# Allegro board test.brd
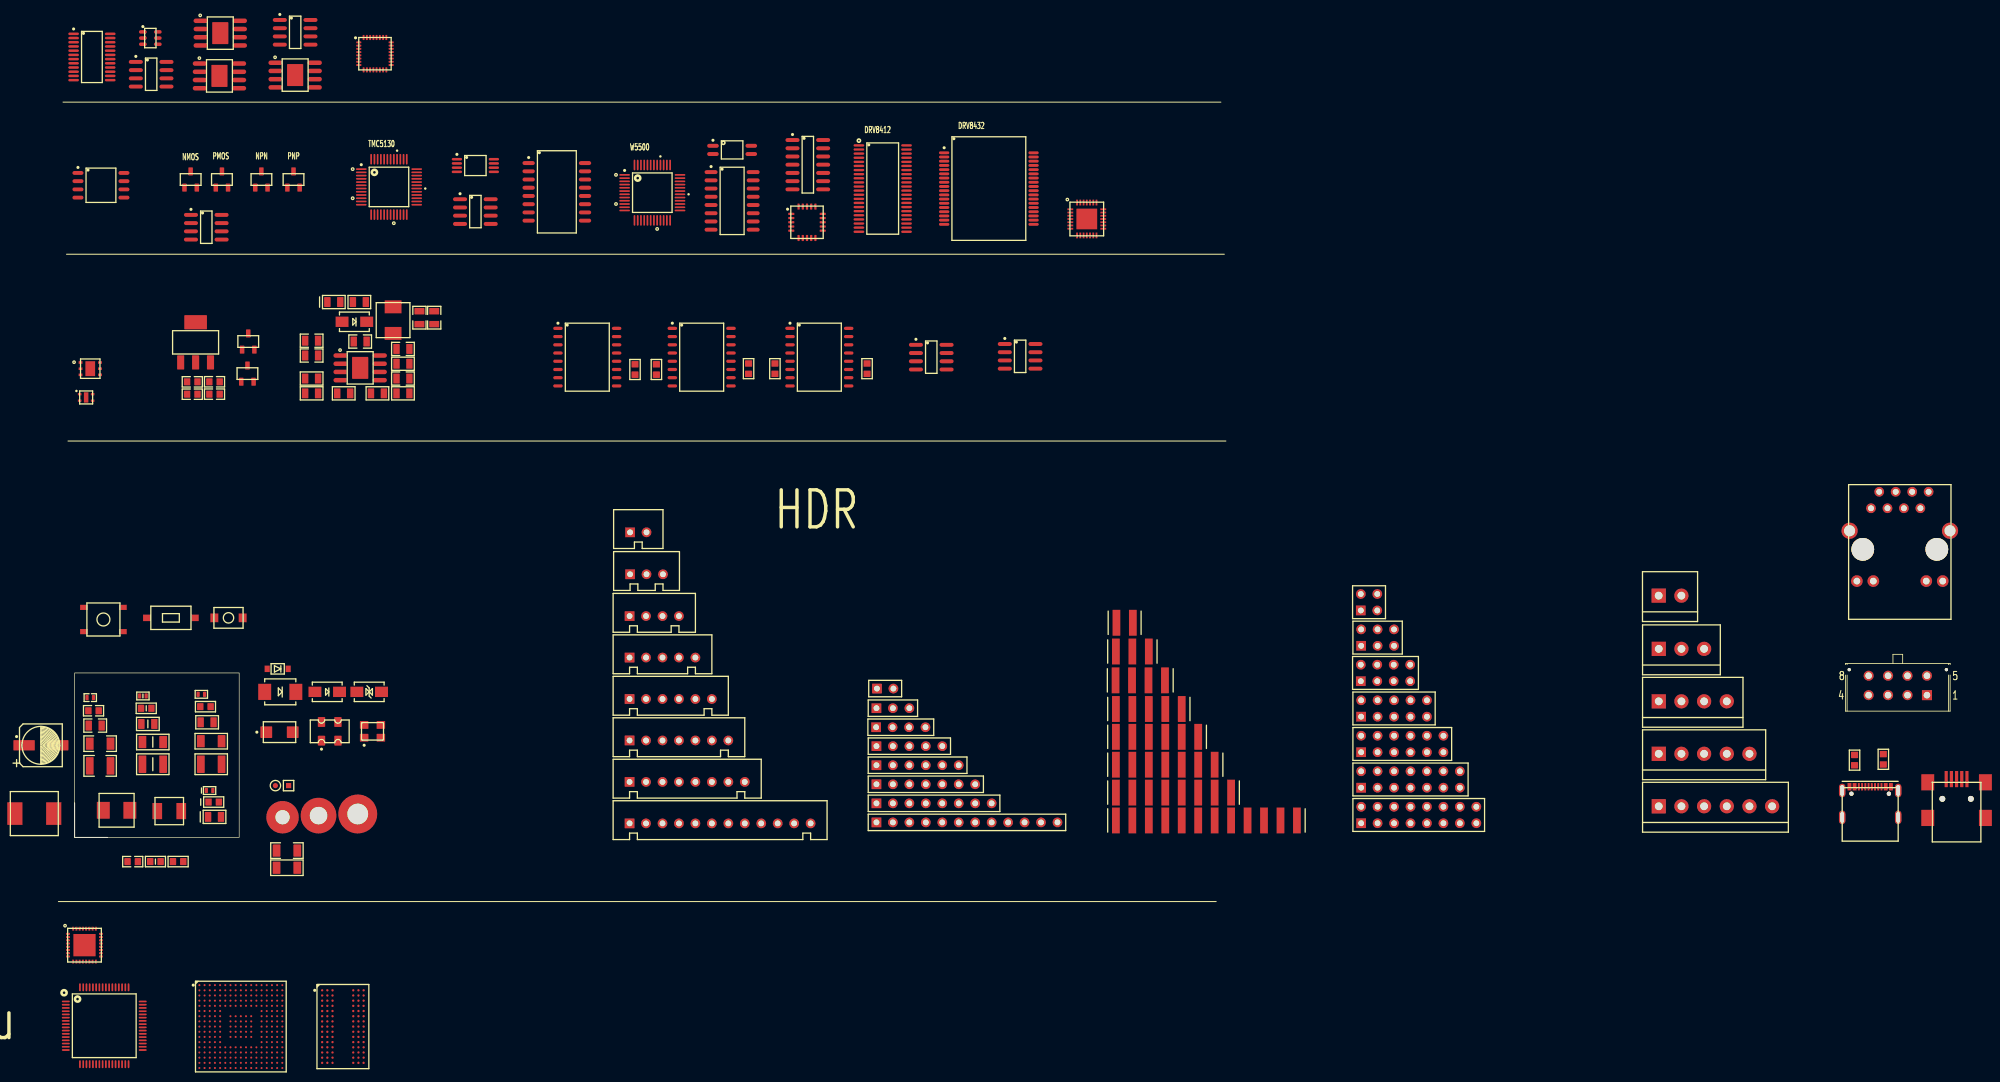
[diagram p0: board, top side]
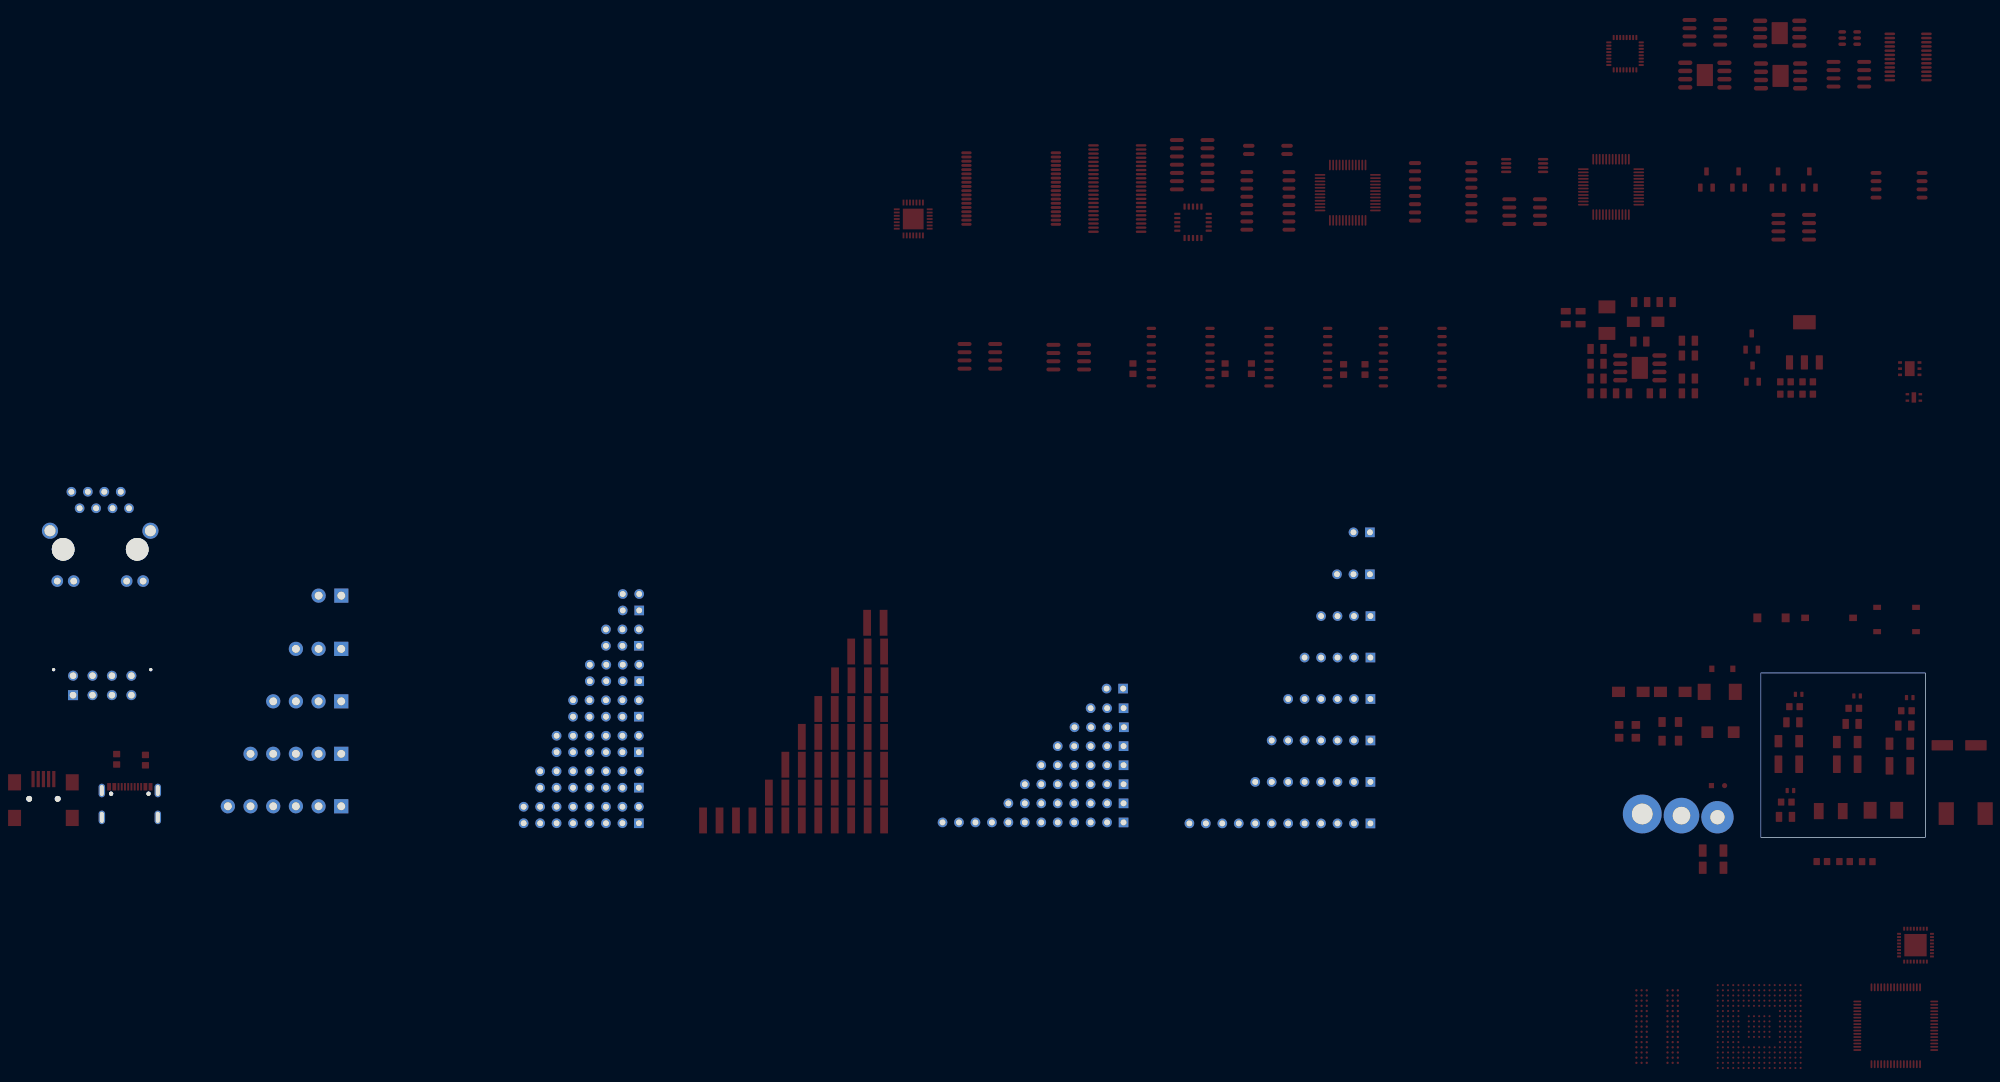
[diagram p1: board, bottom side, seen from below]

Outline 25.4 x 25.4 mm; copper layers: TOP, BOTTOM. Coordinates in mm from the lower left corner of the outline.
Outline path: rectangle 0,0 25.4,25.4

## Placement (name value [footprint] x y rotation side)
C1  100nF  [C0402]  2.41 21.59 0 top
C2  100nF  [C0603]  2.92 19.56 0 top
C3  100nF  [C0805]  3.17 17.27 0 top
C4  100nF  [C1206]  3.94 14.48 0 top
C5  100nF  [C1210]  3.94 11.05 0 top
C6  100nF  [C0805]  44.07 76.58 0 top
C7  100nF  [C0805]  36.58 76.71 0 top
C8  2.2uF  [C0805]  36.58 74.42 0 top
C9  100nF  [C0805]  55.5 80.26 90 top
C10  10uF  [C0805]  53.21 80.26 90 top
C11  4.7nF  [C0805]  50.67 75.44 0 top
C12  4.7pF  [C0805]  50.67 70.87 180 top
C13  100nF  [C0603]  21.59 68.45 0 top
C14  10uF  [C0603]  21.59 70.36 0 top
C15  100nF  [C0603]  18.16 68.45 180 top
C16  10uF  [C0603]  18.16 70.36 180 top
C17  47uF  [CAPAE660X550]  -5.21 14.22 0 top
C18  100nF  [C0603]  8.97 -3.74 0 top
C19  1nF 2KV  [C1206]  32.77 -2.03 0 top
D1  SS34  [SMA]  41.27 79.63 0 top
D2  SS34  [SMA]  37.08 22.48 0 top
D3  SS54  [SMB]  29.34 22.48 0 top
D4  SMAJ24CA  [SMA_CA]  43.56 22.48 0 top
D5  SS1060  [SOD123]  29.72 26.04 0 top
H1  -  [HR911105A]  281.69 46.48 0 top
J1  -  [TYPE-C-16P]  277.11 5.46 0 top
J2  USB-MINI  [U-M-M5SS-W-2]  290.45 8.51 90 top
J3  CON2  [XH2-254]  85.72 47.12 0 top
J4  CON3  [XH3-254]  85.72 40.64 0 top
J5  CON4  [XH4-254]  85.65 34.18 0 top
J6  CON5  [XH5-254]  85.65 27.78 0 top
J7  CON6  [XH6-254]  85.65 21.38 0 top
J8  CON7  [XH7-254]  85.65 14.97 0 top
J9  CON8  [XH8-254]  85.65 8.57 0 top
J10  CON12  [XH12-254]  85.65 2.17 0 top
J11  CON2  [KF2EDGV-35-2P]  244.47 37.34 0 top
J12  CON3  [KF2EDGV-35-3P]  244.48 29.12 0 top
J13  CON4  [KF2EDGV-35-4P]  244.48 21.02 0 top
J14  CON5  [KF2EDGV-35-5P]  244.48 12.91 0 top
J15  CON6  [KF2EDGV-35-6P]  244.48 4.81 0 top
J16  MOLEX-430450812  [SYM-43045-0812]  285.88 21.97 0 top
J17  CON2  [TH2-254]  123.83 22.99 0 top
J18  CON3  [TH3-254]  123.75 19.96 0 top
J19  CON4  [TH4-254]  123.7 17.02 0 top
J20  CON5  [TH5-254]  123.75 14.09 0 top
J21  CON6  [TH6-254]  123.75 11.15 0 top
J22  CON7  [TH7-254]  123.75 8.21 0 top
J23  CON8  [TH8-254]  123.75 5.26 0 top
J24  CON12  [TH12-254]  123.75 2.32 0 top
J25  CON2X2  [TH2X2-254]  198.5 35.05 0 top
J26  CON3X2  [TH3X2-254]  198.55 29.59 0 top
J27  CON4X2  [TH4X2-254]  198.5 24.13 0 top
J28  CON5X2  [TH5X2-254]  198.55 18.64 0 top
J29  CON6X2  [TH6X2-254]  198.55 13.16 0 top
J30  CON7X2  [TH7X2-254]  198.55 7.68 0 top
J31  CON8X2  [TH8X2-254]  198.55 2.19 0 top
J32  CON2  [TH2T-254]  160.78 33.15 0 top
J33  CON3  [TH3T-254]  160.7 28.71 0 top
J34  CON4  [TH4T-254]  160.66 24.26 0 top
J35  CON5  [TH5T-254]  160.7 19.83 0 top
J36  CON6  [TH6T-254]  160.7 15.53 0 top
J37  CON7  [TH7T-254]  160.7 11.23 0 top
J38  CON8  [TH8T-254]  160.7 6.92 0 top
J39  CON12  [TH12T-254]  160.7 2.62 0 top
K1  -  [TS-1187A]  4.45 33.66 0 top
K2  TS-1101-C-W  [K36_60]  14.86 33.91 0 top
K3  -  [SKRKAEE020]  23.75 33.91 0 top
L1  4.7uH  [L0402]  10.54 21.84 0 top
L2  4.7uH  [L0603]  11.05 19.94 0 top
L3  4.7uH  [L0805]  11.3 17.53 0 top
L4  4.7uH  [L1206]  12.06 14.73 0 top
L5  4.7uH  [L1210]  12.06 11.3 0 top
L6  4.7uH  [L4020]  14.61 4.06 0 top
L7  4.7uH  [L5030]  6.48 4.19 0 top
L8  4.7uH  [L5030]  49.15 79.88 90 top
L9  4.7uH  [L6030]  -6.22 3.68 0 top
L10  4.7uH  [L0603]  12.47 -3.73 0 top
LED1  LED-B  [LED0402-RD]  20.83 7.24 0 top
LED2  LED-B  [LED0603-RD]  21.46 5.46 0 top
LED3  LED-B  [LED0805-RD]  21.59 3.17 0 top
LED4  LED-R  [LED0805-RD]  40.01 82.68 0 top
M1  2N7002  [SOT-23-3L-BR]  17.91 101.6 270 top
M2  AO3401A  [SOT-23-3L-BR]  22.73 101.6 270 top
Q1  SS8050  [SOT-23-3L-BR]  28.83 101.6 270 top
Q2  SS8550  [SOT-23-3L-BR]  33.78 101.6 270 top
R1  10K  [R0402]  19.56 22.1 0 top
R2  10K  [R0603]  20.19 20.19 0 top
R3  10K  [R0805]  20.45 17.78 0 top
R4  10K  [R1206]  21.08 14.86 0 top
R5  10K  [R1210]  21.08 11.3 0 top
R6  5.1k  [R0603]  274.7 11.94 270 top
R7  5.1k  [R0603]  279.15 12.06 270 top
R8  100K  [R0805]  36.58 70.87 180 top
R9  33K  [R0805]  36.58 68.58 0 top
R10  100K  [R0805]  41.53 68.58 180 top
R11  12K  [R0805]  50.67 73.15 180 top
R12  51K  [R0805]  50.67 68.58 0 top
R13  10K  [R0805]  46.74 68.58 0 top
R14  10K  [R0805]  43.94 82.68 0 top
R15  10K  [R0603]  86.49 72.26 90 top
R16  10K  [R0603]  104.01 72.39 90 top
R17  10K  [R0603]  122.3 72.39 90 top
R18  10K  [R0603]  89.79 72.26 90 top
R19  10K  [R0603]  108.08 72.39 90 top
R20  10K  [R0603]  15.97 -3.73 0 top
R21  10M  [R1206]  32.76 -4.68 0 top
T1  -  [TP80]  30.99 8 0 top
T2  -  [TPS80]  33.02 8 0 top
T3  M2.0  [MTG220_500]  32.09 3.12 0 top
T4  M2.5  [MTG270_550]  37.64 3.37 0 top
T5  M3.0  [MTG320_600]  43.7 3.62 0 top
U1  STM32L432KCU6  [QFN-32-50]  1.52 -16.64 0 top
U2  SHT20  [DFN-6]  2.41 72.39 90 top
U3  SHTC3  [DFN-4]  1.78 67.94 0 top
U4  TPS54340  [SOIC-8-BL-EP]  44.07 72.52 270 top
U5  ADUM1400  [SOIC127P1032X265-16]  79.12 74.17 270 top
U6  ADUM1401  [SOIC127P1032X265-16]  96.77 74.17 270 top
U8  ADUM1402  [SOIC127P1032X265-16]  114.94 74.17 270 top
U9  ADUM3200  [SOIC127P600X175-8]  132.21 74.17 270 top
U10  ADUM3201  [SOIC127P600X175-8]  145.92 74.3 270 top
U11  W25Q128  [SOIC127P790X195-8]  4.06 100.71 270 top
U12  STM32F405RGT6  [TSQFP50P1290X1290X120-64]  4.57 -29.08 0 top
U13  STM32H743XIH6  [TFBGA240_25]  25.65 -29.21 0 top
U14  IS42S32800G  [BGA90C80P9X15_800X1300X120]  41.4 -29.21 0 top
U15  AMS1117-3.3  [SOT-223-3-BR]  18.67 76.45 270 top
U16  IRF9310TRPBF  [SOIC127P600X175-8]  20.32 94.23 270 top
U17  ME6211A33M3G-N  [SOT-23-3L-BR]  26.8 76.58 270 top
U18  TMC5130-TA  [TSQFP50P900X900X160-48]  48.51 100.46 0 top
U19  SN74CBT3306PWR  [TSOP65P640X110-8]  61.85 103.76 270 top
U20  SLVU2.8-4  [SOIC127P600X175-8]  61.85 96.65 270 top
U21  13F-39MNL  [SOP127P970X508-16]  74.42 99.69 270 top
U22  W5500  [TSQFP50P900X900X160-48]  89.15 99.57 0 top
U23  PS2801-1  [SOP127P680-4]  101.47 106.17 270 top
U24  PS2801C-4  [SOIC127P760X203-16]  101.47 98.3 270 top
U25  CD4078B  [SOIC127P600X175-14]  113.16 103.89 270 top
U26  MAX31865  [QFN65P500X500X100-21A]  113.03 95 0 top
U27  DRV8412  [HTSSOP-44]  124.71 100.2 270 top
U28  DRV8432  [SOP65P1400X127-36]  141.1 100.2 270 top
U29  AD5420  [TSOP65P640X120-24]  2.67 120.52 270 top
U30  MP2359DJ-LF-Z  [SOT95P280X100-6]  11.68 123.44 270 top
U32  LM393  [SOIC127P600X175-8]  11.81 117.86 270 top
U33  A6211  [SOIC-8-BL-EP]  22.48 124.21 270 top
U34  DRV8870  [SOIC-8-BL-EP]  22.35 117.6 270 top
U35  OPA2333  [SOIC127P600X175-8]  34.04 124.33 270 top
U36  TMC429-LI  [QFN50P500X500X80-33B]  46.35 121.03 0 top
U37  TP4056  [SOIC-8-BL-EP]  34.04 117.73 270 top
U38  XC6206P332MR  [SOT-23-3L-BR]  26.67 71.63 270 top
U39  CP2102-GMR  [QFN-28-50]  156.21 95.5 0 top
Y1  8MHz  [OSCSF500X320X130-2]  31.62 16.26 0 top
Y2  16MHz  [OSCSC254P350X600X140-4]  39.37 16.38 90 top
Y3  25MHz  [OSCCC250X320X110]  45.97 16.38 90 top

## Library data of the parts
C1 = C0402: User Part Number: pn; Tolerance: RichardLC
C2 C13-C16 = C0603: User Part Number: pn; Tolerance: RichardLC
C3 C6-C12 = C0805: User Part Number: pn; Tolerance: RichardLC
C4 C19 = C1206: User Part Number: pn; Tolerance: RichardLC
C5 = C1210: User Part Number: pn; Tolerance: RichardLC
C17 = CAP+: User Part Number: pn; Tolerance: RichardLC
C18 = C: User Part Number: pn; Tolerance: RichardLC
D1-D3 D5 = DIODE
D4 = DIODE_CA
H1 = HR911105A: User Part Number: pn; Tolerance: RichardLC
J1 = TYPE-C-16P: User Part Number: pn; Tolerance: RichardLC
J2 = USB-MINI: User Part Number: pn; Tolerance: RichardLC
J3 J11 J17 J32 = CON2: User Part Number: pn; Tolerance: RichardLC
J4 J12 J18 J33 = CON3: User Part Number: pn; Tolerance: RichardLC
J5 J13 J19 J34 = CON4: User Part Number: pn; Tolerance: RichardLC
J6 J14 J20 J35 = CON5: User Part Number: pn; Tolerance: RichardLC
J7 J15 J21 J36 = CON6: User Part Number: pn; Tolerance: RichardLC
J8 J22 J37 = CON7: User Part Number: pn; Tolerance: RichardLC
J9 J23 J38 = CON8: User Part Number: pn; Tolerance: RichardLC
J10 J24 J39 = CON12: User Part Number: pn; Tolerance: RichardLC
J16 = MOLEX-430450812
J25 = CON2X2: User Part Number: pn; Tolerance: RichardLC
J26 = CON3X2: User Part Number: pn; Tolerance: RichardLC
J27 = CON4X2: User Part Number: pn; Tolerance: RichardLC
J28 = CON5X2: User Part Number: pn; Tolerance: RichardLC
J29 = CON6X2: User Part Number: pn; Tolerance: RichardLC
J30 = CON7X2: User Part Number: pn; Tolerance: RichardLC
J31 = CON8X2: User Part Number: pn; Tolerance: RichardLC
K1 = BUTTON-4: User Part Number: pn; Tolerance: RichardLC
K2 K3 = BUTTON: User Part Number: pn; Tolerance: RichardLC
L1 = L0402: User Part Number: pn; Tolerance: RichardLC
L2 = L0603: User Part Number: pn; Tolerance: RichardLC
L3 = L0805: User Part Number: pn; Tolerance: RichardLC
L4 = L1206: User Part Number: pn; Tolerance: RichardLC
L5 = L1210: User Part Number: pn; Tolerance: RichardLC
L6 = L4020: User Part Number: pn; Tolerance: RichardLC
L7 L8 = L5030: User Part Number: pn; Tolerance: RichardLC
L9 = L6030: User Part Number: pn; Tolerance: RichardLC
L10 = L: User Part Number: pn; Tolerance: RichardLC
LED1 = LED0402-RD: User Part Number: pn; Tolerance: RichardLC
LED2 = LED0603-RD: User Part Number: pn; Tolerance: RichardLC
LED3 LED4 = LED0805-RD: User Part Number: pn; Tolerance: RichardLC
M1 = MOSFET_N: User Part Number: pn; Tolerance: RichardLC
M2 = MOSFET_P: User Part Number: pn; Tolerance: RichardLC
Q1 = NPN: User Part Number: pn; Tolerance: RichardLC
Q2 = PNP: User Part Number: pn; Tolerance: RichardLC
R1 = R0402: User Part Number: pn; Tolerance: RichardLC
R2 R6 R7 R15-R19 = R0603: User Part Number: pn; Tolerance: RichardLC
R3 R8-R14 = R0805: User Part Number: pn; Tolerance: RichardLC
R4 R21 = R1206: User Part Number: pn; Tolerance: RichardLC
R5 = R1210: User Part Number: pn; Tolerance: RichardLC
R20 = R: User Part Number: pn; Tolerance: RichardLC
T1-T5 = TP: User Part Number: pn; Tolerance: RichardLC
U1 = STM32L432KCU6: User Part Number: pn; Tolerance: RichardLC
U2 = SHT20: User Part Number: pn; Tolerance: RichardLC
U3 = SHTC3: User Part Number: pn; Tolerance: RichardLC
U4 = TPS54340: User Part Number: pn; Tolerance: RichardLC
U5 = ADUM1400: User Part Number: pn; Tolerance: RichardLC
U6 = ADUM1401: User Part Number: pn; Tolerance: RichardLC
U8 = ADUM1402: User Part Number: pn; Tolerance: RichardLC
U9 = ADUM3200: User Part Number: pn; Tolerance: RichardLC
U10 = ADUM3201: User Part Number: pn; Tolerance: RichardLC
U11 = W25Q16: User Part Number: pn; Tolerance: RichardLC
U12 = STM32F405RGT6: User Part Number: pn; Tolerance: RichardLC
U13 = STM32H743XIH6: User Part Number: pn; Tolerance: RichardLC
U14 = IS42S32800G: User Part Number: pn; Tolerance: RichardLC
U15 = AMS1117: User Part Number: pn; Tolerance: RichardLC
U16 = IRF9310TRPBF: User Part Number: pn; Tolerance: RichardLC
U17 U38 = ME6211A33M3G-N: User Part Number: pn; Tolerance: RichardLC
U18 = TMC5130-TA: User Part Number: pn; Tolerance: RichardLC
U19 = SN74CBT3306PWR: User Part Number: pn; Tolerance: RichardLC
U20 = SLVU2.8-4: User Part Number: pn; Tolerance: RichardLC
U21 = 13F-39MNL: User Part Number: pn; Tolerance: RichardLC
U22 = W5500: User Part Number: pn; Tolerance: RichardLC
U23 = PS2801-1: User Part Number: pn; Tolerance: RichardLC
U24 = PS2801C-4: User Part Number: pn; Tolerance: RichardLC
U25 = CD4078B: User Part Number: pn; Tolerance: RichardLC
U26 = MAX31865: User Part Number: pn; Tolerance: RichardLC
U27 = DRV8412: User Part Number: pn; Tolerance: RichardLC
U28 = DRV8432: User Part Number: pn; Tolerance: RichardLC
U29 = AD5420: User Part Number: pn; Tolerance: RichardLC
U30 = MP2359DJ-LF-Z: User Part Number: pn; Tolerance: RichardLC
U32 = LM393: User Part Number: pn; Tolerance: RichardLC
U33 = A6211: User Part Number: pn; Tolerance: RichardLC
U34 = DRV8870: User Part Number: pn; Tolerance: RichardLC
U35 = OPA2333: User Part Number: pn; Tolerance: RichardLC
U36 = TMC429-LI: User Part Number: pn; Tolerance: RichardLC
U37 = TP4056: User Part Number: pn; Tolerance: RichardLC
U39 = CP2102-GMR: User Part Number: pn; Tolerance: RichardLC
Y1 = CRYSTAL: User Part Number: pn; Tolerance: RichardLC
Y2 = CRYSTAL_1: User Part Number: pn; Tolerance: RichardLC
Y3 = CRYSTAL_2: User Part Number: pn; Tolerance: RichardLC

## Footprints (pads in the part's own frame, mm; a bottom-side part is the same pattern mirrored in y, then rotated)
BGA90C80P9X15_800X1300X120
  round 0.36 smd: A1(-3.2,5.6) A2(-2.4,5.6) A3(-1.6,5.6) A7(1.6,5.6) A8(2.4,5.6) A9(3.2,5.6) B1(-3.2,4.8) B2(-2.4,4.8) B3(-1.6,4.8) B7(1.6,4.8) B8(2.4,4.8) B9(3.2,4.8) C1(-3.2,4) C2(-2.4,4) C3(-1.6,4) C7(1.6,4) C8(2.4,4) C9(3.2,4) D1(-3.2,3.2) D2(-2.4,3.2) D3(-1.6,3.2) D7(1.6,3.2) D8(2.4,3.2) D9(3.2,3.2) E1(-3.2,2.4) E2(-2.4,2.4) E3(-1.6,2.4) E7(1.6,2.4) E8(2.4,2.4) E9(3.2,2.4) F1(-3.2,1.6) F2(-2.4,1.6) F3(-1.6,1.6) F7(1.6,1.6) F8(2.4,1.6) F9(3.2,1.6) G1(-3.2,0.8) G2(-2.4,0.8) G3(-1.6,0.8) G7(1.6,0.8) G8(2.4,0.8) G9(3.2,0.8) H1(-3.2,0) H2(-2.4,0) H3(-1.6,0) H7(1.6,0) H8(2.4,0) H9(3.2,0) J1(-3.2,-0.8) J2(-2.4,-0.8) J3(-1.6,-0.8) J7(1.6,-0.8) J8(2.4,-0.8) J9(3.2,-0.8) K1(-3.2,-1.6) K2(-2.4,-1.6) K3(-1.6,-1.6) K7(1.6,-1.6) K8(2.4,-1.6) K9(3.2,-1.6) L1(-3.2,-2.4) L2(-2.4,-2.4) L3(-1.6,-2.4) L7(1.6,-2.4) L8(2.4,-2.4) L9(3.2,-2.4) M1(-3.2,-3.2) M2(-2.4,-3.2) M3(-1.6,-3.2) M7(1.6,-3.2) M8(2.4,-3.2) M9(3.2,-3.2) N1(-3.2,-4) N2(-2.4,-4) N3(-1.6,-4) N7(1.6,-4) N8(2.4,-4) N9(3.2,-4) P1(-3.2,-4.8) P2(-2.4,-4.8) P3(-1.6,-4.8) P7(1.6,-4.8) P8(2.4,-4.8) P9(3.2,-4.8) R1(-3.2,-5.6) R2(-2.4,-5.6) R3(-1.6,-5.6) R7(1.6,-5.6) R8(2.4,-5.6) R9(3.2,-5.6)
C0402
  custom 0.5x0.8 smd: 1(-0.5,0) 2(0.5,0)
C0603
  custom 1x1.1 smd: 1(-0.8,0) 2(0.8,0)
C0805
  custom 1x1.55 smd: 1(-1,0) 2(1,0)
C1206
  custom 1.2x1.9 smd: 1(-1.6,0) 2(1.6,0)
C1210
  custom 1.2x2.7 smd: 1(-1.6,0) 2(1.6,0)
CAPAE660X550
  custom 3.31x1.6 smd: 1(-2.595,0) 2(2.595,0)
DFN-4
  custom 0.55x0.35 smd: 1(-1,0.5) 2(-1,-0.5) 3(1,-0.5) 4(1,0.5)
  custom 0.7x1.6 smd: 5(0,0)
DFN-6
  custom 0.4x0.6 smd: 1(0.95,1.5) 2(0,1.5) 3(-0.95,1.5) 4(-0.95,-1.5) 5(0,-1.5) 6(0.95,-1.5)
  custom 2.3x1.5 smd: 7(0,0)
HR911105A
  round 3.5 hole 3.5: (-5.715,-1.995) (5.715,-1.995)
  round 1.499 hole 0.914: 1(-4.445,4.355) 2(-3.175,6.895) 3(-1.905,4.355) 4(-0.635,6.895) 5(0.635,4.355) 6(1.905,6.895) 7(3.175,4.355) 8(4.445,6.895)
  round 1.8 hole 1.04: 9(-6.625,-6.895) 10(-4.085,-6.895) 11(4.085,-6.895) 12(6.625,-6.895)
  round 2.5 hole 1.7: 13(-7.75,0.875) 14(7.75,0.875)
HTSSOP-44
  oval 0.37x1.65 smd: 1(-6.668,-3.675) 2(-6.033,-3.675) 3(-5.398,-3.675) 4(-4.762,-3.675) 5(-4.128,-3.675) 6(-3.493,-3.675) 7(-2.858,-3.675) 8(-2.222,-3.675) 9(-1.588,-3.675) 10(-0.953,-3.675) 11(-0.318,-3.675) 12(0.317,-3.675) 13(0.952,-3.675) 14(1.588,-3.675) 15(2.222,-3.675) 16(2.858,-3.675) 17(3.492,-3.675) 18(4.127,-3.675) 19(4.762,-3.675) 20(5.397,-3.675) 21(6.032,-3.675) 22(6.668,-3.675) 23(6.668,3.675) 24(6.033,3.675) 25(5.398,3.675) 26(4.762,3.675) 27(4.128,3.675) 28(3.493,3.675) 29(2.858,3.675) 30(2.222,3.675) 31(1.588,3.675) 32(0.953,3.675) 33(0.318,3.675) 34(-0.317,3.675) 35(-0.952,3.675) 36(-1.588,3.675) 37(-2.222,3.675) 38(-2.858,3.675) 39(-3.492,3.675) 40(-4.127,3.675) 41(-4.762,3.675) 42(-5.397,3.675) 43(-6.032,3.675) 44(-6.668,3.675)
K36_60
  custom 1.2x1 smd: 1(-3.7,0) 2(3.7,0)
KF2EDGV-35-2P
  rect 2.2x2.2 hole 1.2: 1(0,0)
  round 2.2 hole 1.2: 2(3.5,0)
KF2EDGV-35-3P
  rect 2.2x2.2 hole 1.2: 1(0,0)
  round 2.2 hole 1.2: 2(3.5,0) 3(7,0)
KF2EDGV-35-4P
  rect 2.2x2.2 hole 1.2: 1(0,0)
  round 2.2 hole 1.2: 2(3.5,0) 3(7,0) 4(10.5,0)
KF2EDGV-35-5P
  rect 2.2x2.2 hole 1.2: 1(0,0)
  round 2.2 hole 1.2: 2(3.5,0) 3(7,0) 4(10.5,0) 5(14,0)
KF2EDGV-35-6P
  rect 2.2x2.2 hole 1.2: 1(0,0)
  round 2.2 hole 1.2: 2(3.5,0) 3(7,0) 4(10.5,0) 5(14,0) 6(17.5,0)
L0402
  custom 0.5x0.8 smd: 1(-0.5,0) 2(0.5,0)
L0603
  custom 1x1.1 smd: 1(-0.8,0) 2(0.8,0)
L0805
  custom 1x1.55 smd: 1(-1,0) 2(1,0)
L1206
  custom 1.2x1.9 smd: 1(-1.6,0) 2(1.6,0)
L1210
  custom 1.2x2.7 smd: 1(-1.6,0) 2(1.6,0)
L4020
  custom 1.5x2.5 smd: 1(-1.85,0) 2(1.85,0)
L5030
  custom 2x2.6 smd: 1(-2.05,0) 2(2.05,0)
L6030
  custom 2.35x3.5 smd: 1(-3,0) 2(3,0)
LED0402-RD
  custom 0.5x0.8 smd: 1(-0.5,0) 2(0.5,0)
LED0603-RD
  custom 1x1.1 smd: 1(-0.8,0) 2(0.8,0)
LED0805-RD
  custom 1x1.55 smd: 1(-1,0) 2(1,0)
MTG220_500
  round 5 hole 2.2: 1(0,0)
MTG270_550
  round 5.5 hole 2.7: 1(0,0)
MTG320_600
  round 6 hole 3.2: 1(0,0)
OSCCC250X320X110
  custom 1.22x1.32 smd: 1(-0.99,1.29) 2(-0.99,-1.29) 3(0.99,-1.29) 4(0.99,1.29)
OSCSC254P350X600X140-4
  custom 1.52x1.14 smd: 1(-1.44,1.27) 2(-1.44,-1.27) 3(1.44,-1.27) 4(1.44,1.27)
OSCSF500X320X130-2
  custom 1.82x1.8 smd: 1(-2.04,0) 2(2.04,0)
QFN50P500X500X80-33B
  custom 0.8x0.3 smd: 1(-2.5,1.75) 2(-2.5,1.25) 3(-2.5,0.75) 4(-2.5,0.25) 5(-2.5,-0.25) 6(-2.5,-0.75) 7(-2.5,-1.25) 8(-2.5,-1.75) 17(2.5,-1.75) 18(2.5,-1.25) 19(2.5,-0.75) 20(2.5,-0.25) 21(2.5,0.25) 22(2.5,0.75) 23(2.5,1.25) 24(2.5,1.75)
  custom 0.3x0.8 smd: 9(-1.75,-2.5) 10(-1.25,-2.5) 11(-0.75,-2.5) 12(-0.25,-2.5) 13(0.25,-2.5) 14(0.75,-2.5) 15(1.25,-2.5) 16(1.75,-2.5) 25(1.75,2.5) 26(1.25,2.5) 27(0.75,2.5) 28(0.25,2.5) 29(-0.25,2.5) 30(-0.75,2.5) 31(-1.25,2.5) 32(-1.75,2.5)
QFN65P500X500X100-21A
  custom 0.95x0.35 smd: 1(-2.425,1.3) 2(-2.425,0.65) 3(-2.425,0) 4(-2.425,-0.65) 5(-2.425,-1.3) 11(2.425,-1.3) 12(2.425,-0.65) 13(2.425,0) 14(2.425,0.65) 15(2.425,1.3)
  custom 0.35x0.95 smd: 6(-1.3,-2.425) 7(-0.65,-2.425) 8(0,-2.425) 9(0.65,-2.425) 10(1.3,-2.425) 16(1.3,2.425) 17(0.65,2.425) 18(0,2.425) 19(-0.65,2.425) 20(-1.3,2.425)
QFN-28-50
  custom 3.2x3.2 smd: (0,0)
  custom 0.9x0.28 smd: 1(-2.54,1.5) 2(-2.54,1) 3(-2.54,0.5) 4(-2.54,0) 5(-2.54,-0.5) 6(-2.54,-1) 7(-2.54,-1.5) 15(2.54,-1.5) 16(2.54,-1) 17(2.54,-0.5) 18(2.54,0) 19(2.54,0.5) 20(2.54,1) 21(2.54,1.5)
  custom 0.28x0.9 smd: 8(-1.5,-2.54) 9(-1,-2.54) 10(-0.5,-2.54) 11(0,-2.54) 12(0.5,-2.54) 13(1,-2.54) 14(1.5,-2.54) 22(1.5,2.54) 23(1,2.54) 24(0.5,2.54) 25(0,2.54) 26(-0.5,2.54) 27(-1,2.54) 28(-1.5,2.54)
QFN-32-50
  custom 3.45x3.45 smd: (0,0)
  custom 0.6x0.3 smd: 1(-2.54,1.75) 2(-2.54,1.25) 3(-2.54,0.75) 4(-2.54,0.25) 5(-2.54,-0.25) 6(-2.54,-0.75) 7(-2.54,-1.25) 8(-2.54,-1.75) 17(2.54,-1.75) 18(2.54,-1.25) 19(2.54,-0.75) 20(2.54,-0.25) 21(2.54,0.25) 22(2.54,0.75) 23(2.54,1.25) 24(2.54,1.75)
  custom 0.3x0.6 smd: 9(-1.75,-2.54) 10(-1.25,-2.54) 11(-0.75,-2.54) 12(-0.25,-2.54) 13(0.25,-2.54) 14(0.75,-2.54) 15(1.25,-2.54) 16(1.75,-2.54) 25(1.75,2.54) 26(1.25,2.54) 27(0.75,2.54) 28(0.25,2.54) 29(-0.25,2.54) 30(-0.75,2.54) 31(-1.25,2.54) 32(-1.75,2.54)
R0402
  custom 0.5x0.8 smd: 1(-0.5,0) 2(0.5,0)
R0603
  custom 1x1.1 smd: 1(-0.8,0) 2(0.8,0)
R0805
  custom 1x1.55 smd: 1(-1,0) 2(1,0)
R1206
  custom 1.2x1.9 smd: 1(-1.6,0) 2(1.6,0)
R1210
  custom 1.2x2.7 smd: 1(-1.6,0) 2(1.6,0)
SKRKAEE020
  custom 1.23x1.36 smd: 1(-2.185,0) 2(2.185,0)
SMA
  rect 2x1.6 smd: 1(0,0) 2(3.8,0)
SMA_CA
  rect 2x1.6 smd: 1(0,0) 2(3.8,0)
SMB
  rect 2x2.5 smd: 1(0,0) 2(4.8,0)
SOD123
  rect 0.8x1 smd: 1(0,0) 2(3.24,0)
SOIC127P600X175-8
  oval 0.61x2.17 smd: 1(-1.905,-2.365) 2(-0.635,-2.365) 3(0.635,-2.365) 4(1.905,-2.365) 5(1.905,2.365) 6(0.635,2.365) 7(-0.635,2.365) 8(-1.905,2.365)
SOIC127P600X175-14
  oval 0.61x2.17 smd: 1(-3.81,-2.365) 2(-2.54,-2.365) 3(-1.27,-2.365) 4(0,-2.365) 5(1.27,-2.365) 6(2.54,-2.365) 7(3.81,-2.365) 8(3.81,2.365) 9(2.54,2.365) 10(1.27,2.365) 11(0,2.365) 12(-1.27,2.365) 13(-2.54,2.365) 14(-3.81,2.365)
SOIC127P760X203-16
  oval 0.61x2 smd: 1(-4.445,-3.25) 2(-3.175,-3.25) 3(-1.905,-3.25) 4(-0.635,-3.25) 5(0.635,-3.25) 6(1.905,-3.25) 7(3.175,-3.25) 8(4.445,-3.25) 9(4.445,3.25) 10(3.175,3.25) 11(1.905,3.25) 12(0.635,3.25) 13(-0.635,3.25) 14(-1.905,3.25) 15(-3.175,3.25) 16(-4.445,3.25)
SOIC127P790X195-8
  oval 0.6x1.7 smd: 1(-1.905,-3.55) 2(-0.635,-3.55) 3(0.635,-3.55) 4(1.905,-3.55) 5(1.905,3.55) 6(0.635,3.55) 7(-0.635,3.55) 8(-1.905,3.55)
SOIC127P1032X265-16
  oval 0.5x1.47 smd: 1(-4.445,-4.527) 2(-3.175,-4.527) 3(-1.905,-4.527) 4(-0.635,-4.527) 5(0.635,-4.527) 6(1.905,-4.527) 7(3.175,-4.527) 8(4.445,-4.527) 9(4.445,4.527) 10(3.175,4.527) 11(1.905,4.527) 12(0.635,4.527) 13(-0.635,4.527) 14(-1.905,4.527) 15(-3.175,4.527) 16(-4.445,4.527)
SOIC-8-BL-EP
  oval 0.7x2.2 smd: 1(-1.905,-3.023) 2(-0.635,-3.023) 3(0.635,-3.023) 4(1.905,-3.023) 5(1.905,3.023) 6(0.635,3.023) 7(-0.635,3.023) 8(-1.905,3.023)
  custom 3.4x2.5 smd: 9(0,0)
SOP65P1400X127-36
  oval 0.45x1.6 smd: 1(-5.525,-6.9) 2(-4.875,-6.9) 3(-4.225,-6.9) 4(-3.575,-6.9) 5(-2.925,-6.9) 6(-2.275,-6.9) 7(-1.625,-6.9) 8(-0.975,-6.9) 9(-0.325,-6.9) 10(0.325,-6.9) 11(0.975,-6.9) 12(1.625,-6.9) 13(2.275,-6.9) 14(2.925,-6.9) 15(3.575,-6.9) 16(4.225,-6.9) 17(4.875,-6.9) 18(5.525,-6.9) 19(5.525,6.9) 20(4.875,6.9) 21(4.225,6.9) 22(3.575,6.9) 23(2.925,6.9) 24(2.275,6.9) 25(1.625,6.9) 26(0.975,6.9) 27(0.325,6.9) 28(-0.325,6.9) 29(-0.975,6.9) 30(-1.625,6.9) 31(-2.275,6.9) 32(-2.925,6.9) 33(-3.575,6.9) 34(-4.225,6.9) 35(-4.875,6.9) 36(-5.525,6.9)
SOP127P680-4
  oval 0.61x1.79 smd: 1(-0.635,-2.955) 2(0.635,-2.955) 3(0.635,2.955) 4(-0.635,2.955)
SOP127P970X508-16
  oval 0.61x1.9 smd: 1(-4.445,-4.35) 2(-3.175,-4.35) 3(-1.905,-4.35) 4(-0.635,-4.35) 5(0.635,-4.35) 6(1.905,-4.35) 7(3.175,-4.35) 8(4.445,-4.35) 9(4.445,4.35) 10(3.175,4.35) 11(1.905,4.35) 12(0.635,4.35) 13(-0.635,4.35) 14(-1.905,4.35) 15(-3.175,4.35) 16(-4.445,4.35)
SOT95P280X100-6
  oval 0.55x1.2 smd: 1(-0.95,-1.15) 2(0,-1.15) 3(0.95,-1.15) 4(0.95,1.15) 5(0,1.15) 6(-0.95,1.15)
SOT-23-3L-BR
  custom 1.25x0.7 smd: 1(1.25,-0.95) 2(1.25,0.95) 3(-1.25,0)
SOT-223-3-BR
  custom 2.2x1.1 smd: 1(3.099,-2.3) 2(3.099,0) 3(3.099,2.3)
  custom 2.2x3.5 smd: 4(-3.099,0)
SYM-43045-0812
  round 0.5 hole 1.02 unplated: (-12,3.94) (3,3.94)
  rect 1.549x1.549 hole 1.02: 1(0,0)
  round 1.549 hole 1.02: 2(-3,0) 3(-6,0) 4(-9,0) 5(0,3) 6(-3,3) 7(-6,3) 8(-9,3)
TFBGA240_25
  round 0.32 smd: A1(-6.4,6.4) A2(-5.6,6.4) A3(-4.8,6.4) A4(-4,6.4) A5(-3.2,6.4) A6(-2.4,6.4) A7(-1.6,6.4) A8(-0.8,6.4) A9(0,6.4) A10(0.8,6.4) A11(1.6,6.4) A12(2.4,6.4) A13(3.2,6.4) A14(4,6.4) A15(4.8,6.4) A16(5.6,6.4) A17(6.4,6.4) B1(-6.4,5.6) B2(-5.6,5.6) B3(-4.8,5.6) B4(-4,5.6) B5(-3.2,5.6) B6(-2.4,5.6) B7(-1.6,5.6) B8(-0.8,5.6) B9(0,5.6) B10(0.8,5.6) B11(1.6,5.6) B12(2.4,5.6) B13(3.2,5.6) B14(4,5.6) B15(4.8,5.6) B16(5.6,5.6) B17(6.4,5.6) C1(-6.4,4.8) C2(-5.6,4.8) C3(-4.8,4.8) C4(-4,4.8) C5(-3.2,4.8) C6(-2.4,4.8) C7(-1.6,4.8) C8(-0.8,4.8) C9(0,4.8) C10(0.8,4.8) C11(1.6,4.8) C12(2.4,4.8) C13(3.2,4.8) C14(4,4.8) C15(4.8,4.8) C16(5.6,4.8) C17(6.4,4.8) D1(-6.4,4) D2(-5.6,4) D3(-4.8,4) D4(-4,4) D5(-3.2,4) D6(-2.4,4) D7(-1.6,4) D8(-0.8,4) D9(0,4) D10(0.8,4) D11(1.6,4) D12(2.4,4) D13(3.2,4) D14(4,4) D15(4.8,4) D16(5.6,4) D17(6.4,4) E1(-6.4,3.2) E2(-5.6,3.2) E3(-4.8,3.2) E4(-4,3.2) E5(-3.2,3.2) E6(-2.4,3.2) E7(-1.6,3.2) E8(-0.8,3.2) E9(0,3.2) E10(0.8,3.2) E11(1.6,3.2) E12(2.4,3.2) E13(3.2,3.2) E14(4,3.2) E15(4.8,3.2) E16(5.6,3.2) E17(6.4,3.2) F1(-6.4,2.4) F2(-5.6,2.4) F3(-4.8,2.4) F4(-4,2.4) F5(-3.2,2.4) F13(3.2,2.4) F14(4,2.4) F15(4.8,2.4) F16(5.6,2.4) F17(6.4,2.4) G1(-6.4,1.6) G2(-5.6,1.6) G3(-4.8,1.6) G4(-4,1.6) G5(-3.2,1.6) G7(-1.6,1.6) G8(-0.8,1.6) G9(0,1.6) G10(0.8,1.6) G11(1.6,1.6) G13(3.2,1.6) G14(4,1.6) G15(4.8,1.6) G16(5.6,1.6) G17(6.4,1.6) H1(-6.4,0.8) H2(-5.6,0.8) H3(-4.8,0.8) H4(-4,0.8) H5(-3.2,0.8) H7(-1.6,0.8) H8(-0.8,0.8) H9(0,0.8) H10(0.8,0.8) H11(1.6,0.8) H13(3.2,0.8) H14(4,0.8) H15(4.8,0.8) H16(5.6,0.8) H17(6.4,0.8) J1(-6.4,0) J2(-5.6,0) J3(-4.8,0) J4(-4,0) J5(-3.2,0) J7(-1.6,0) J8(-0.8,0) J9(0,0) J10(0.8,0) J11(1.6,0) J13(3.2,0) J14(4,0) J15(4.8,0) J16(5.6,0) J17(6.4,0) K1(-6.4,-0.8) K2(-5.6,-0.8) K3(-4.8,-0.8) K4(-4,-0.8) K5(-3.2,-0.8) K7(-1.6,-0.8) K8(-0.8,-0.8) K9(0,-0.8) K10(0.8,-0.8) K11(1.6,-0.8) K13(3.2,-0.8) K14(4,-0.8) K15(4.8,-0.8) K16(5.6,-0.8) K17(6.4,-0.8) L1(-6.4,-1.6) L2(-5.6,-1.6) L3(-4.8,-1.6) L4(-4,-1.6) L5(-3.2,-1.6) L7(-1.6,-1.6) L8(-0.8,-1.6) L9(0,-1.6) L10(0.8,-1.6) L11(1.6,-1.6) L13(3.2,-1.6) L14(4,-1.6) L15(4.8,-1.6) L16(5.6,-1.6) L17(6.4,-1.6) M1(-6.4,-2.4) M2(-5.6,-2.4) M3(-4.8,-2.4) M4(-4,-2.4) M5(-3.2,-2.4) M13(3.2,-2.4) M14(4,-2.4) M15(4.8,-2.4) M16(5.6,-2.4) M17(6.4,-2.4) N1(-6.4,-3.2) N2(-5.6,-3.2) N3(-4.8,-3.2) N4(-4,-3.2) N5(-3.2,-3.2) N6(-2.4,-3.2) N7(-1.6,-3.2) N8(-0.8,-3.2) N9(0,-3.2) N10(0.8,-3.2) N11(1.6,-3.2) N12(2.4,-3.2) N13(3.2,-3.2) N14(4,-3.2) N15(4.8,-3.2) N16(5.6,-3.2) N17(6.4,-3.2) P1(-6.4,-4) P2(-5.6,-4) P3(-4.8,-4) P4(-4,-4) P5(-3.2,-4) P6(-2.4,-4) P7(-1.6,-4) P8(-0.8,-4) P9(0,-4) P10(0.8,-4) P11(1.6,-4) P12(2.4,-4) P13(3.2,-4) P14(4,-4) P15(4.8,-4) P16(5.6,-4) P17(6.4,-4) R1(-6.4,-4.8) R2(-5.6,-4.8) R3(-4.8,-4.8) R4(-4,-4.8) R5(-3.2,-4.8) R6(-2.4,-4.8) R7(-1.6,-4.8) R8(-0.8,-4.8) R9(0,-4.8) R10(0.8,-4.8) R11(1.6,-4.8) R12(2.4,-4.8) R13(3.2,-4.8) R14(4,-4.8) R15(4.8,-4.8) R16(5.6,-4.8) R17(6.4,-4.8) T1(-6.4,-5.6) T2(-5.6,-5.6) T3(-4.8,-5.6) T4(-4,-5.6) T5(-3.2,-5.6) T6(-2.4,-5.6) T7(-1.6,-5.6) T8(-0.8,-5.6) T9(0,-5.6) T10(0.8,-5.6) T11(1.6,-5.6) T12(2.4,-5.6) T13(3.2,-5.6) T14(4,-5.6) T15(4.8,-5.6) T16(5.6,-5.6) T17(6.4,-5.6) U1(-6.4,-6.4) U2(-5.6,-6.4) U3(-4.8,-6.4) U4(-4,-6.4) U5(-3.2,-6.4) U6(-2.4,-6.4) U7(-1.6,-6.4) U8(-0.8,-6.4) U9(0,-6.4) U10(0.8,-6.4) U11(1.6,-6.4) U12(2.4,-6.4) U13(3.2,-6.4) U14(4,-6.4) U15(4.8,-6.4) U16(5.6,-6.4) U17(6.4,-6.4)
TH2-254
  rect 1.5x1.5 hole 0.9: 1(0,0)
  round 1.5 hole 0.9: 2(2.54,0)
TH2T-254
  custom 1.2x4 smd: 1(0,0) 2(2.54,0)
TH2X2-254
  rect 1.5x1.5 hole 0.9: 1(0,0)
  round 1.5 hole 0.9: 2(0,2.54) 3(2.54,0) 4(2.54,2.54)
TH3-254
  rect 1.5x1.5 hole 0.9: 1(0,0)
  round 1.5 hole 0.9: 2(2.54,0) 3(5.08,0)
TH3T-254
  custom 1.2x4 smd: 1(0,0) 2(2.54,0) 3(5.08,0)
TH3X2-254
  rect 1.5x1.5 hole 0.9: 1(0,0)
  round 1.5 hole 0.9: 2(0,2.54) 3(2.54,0) 4(2.54,2.54) 5(5.08,0) 6(5.08,2.54)
TH4-254
  rect 1.5x1.5 hole 0.9: 1(0,0)
  round 1.5 hole 0.9: 2(2.54,0) 3(5.08,0) 4(7.62,0)
TH4T-254
  custom 1.2x4 smd: 1(0,0) 2(2.54,0) 3(5.08,0) 4(7.62,0)
TH4X2-254
  rect 1.5x1.5 hole 0.9: 1(0,0)
  round 1.5 hole 0.9: 2(0,2.54) 3(2.54,0) 4(2.54,2.54) 5(5.08,0) 6(5.08,2.54) 7(7.62,0) 8(7.62,2.54)
TH5-254
  rect 1.5x1.5 hole 0.9: 1(0,0)
  round 1.5 hole 0.9: 2(2.54,0) 3(5.08,0) 4(7.62,0) 5(10.16,0)
TH5T-254
  custom 1.2x4 smd: 1(0,0) 2(2.54,0) 3(5.08,0) 4(7.62,0) 5(10.16,0)
TH5X2-254
  rect 1.5x1.5 hole 0.9: 1(0,0)
  round 1.5 hole 0.9: 2(0,2.54) 3(2.54,0) 4(2.54,2.54) 5(5.08,0) 6(5.08,2.54) 7(7.62,0) 8(7.62,2.54) 9(10.16,0) 10(10.16,2.54)
TH6-254
  rect 1.5x1.5 hole 0.9: 1(0,0)
  round 1.5 hole 0.9: 2(2.54,0) 3(5.08,0) 4(7.62,0) 5(10.16,0) 6(12.7,0)
TH6T-254
  custom 1.2x4 smd: 1(0,0) 2(2.54,0) 3(5.08,0) 4(7.62,0) 5(10.16,0) 6(12.7,0)
TH6X2-254
  rect 1.5x1.5 hole 0.9: 1(0,0)
  round 1.5 hole 0.9: 2(0,2.54) 3(2.54,0) 4(2.54,2.54) 5(5.08,0) 6(5.08,2.54) 7(7.62,0) 8(7.62,2.54) 9(10.16,0) 10(10.16,2.54) 11(12.7,0) 12(12.7,2.54)
TH7-254
  rect 1.5x1.5 hole 0.9: 1(0,0)
  round 1.5 hole 0.9: 2(2.54,0) 3(5.08,0) 4(7.62,0) 5(10.16,0) 6(12.7,0) 7(15.24,0)
TH7T-254
  custom 1.2x4 smd: 1(0,0) 2(2.54,0) 3(5.08,0) 4(7.62,0) 5(10.16,0) 6(12.7,0) 7(15.24,0)
TH7X2-254
  rect 1.5x1.5 hole 0.9: 1(0,0)
  round 1.5 hole 0.9: 2(0,2.54) 3(2.54,0) 4(2.54,2.54) 5(5.08,0) 6(5.08,2.54) 7(7.62,0) 8(7.62,2.54) 9(10.16,0) 10(10.16,2.54) 11(12.7,0) 12(12.7,2.54) 13(15.24,0) 14(15.24,2.54)
TH8-254
  rect 1.5x1.5 hole 0.9: 1(0,0)
  round 1.5 hole 0.9: 2(2.54,0) 3(5.08,0) 4(7.62,0) 5(10.16,0) 6(12.7,0) 7(15.24,0) 8(17.78,0)
TH8T-254
  custom 1.2x4 smd: 1(0,0) 2(2.54,0) 3(5.08,0) 4(7.62,0) 5(10.16,0) 6(12.7,0) 7(15.24,0) 8(17.78,0)
TH8X2-254
  rect 1.5x1.5 hole 0.9: 1(0,0)
  round 1.5 hole 0.9: 2(0,2.54) 3(2.54,0) 4(2.54,2.54) 5(5.08,0) 6(5.08,2.54) 7(7.62,0) 8(7.62,2.54) 9(10.16,0) 10(10.16,2.54) 11(12.7,0) 12(12.7,2.54) 13(15.24,0) 14(15.24,2.54) 15(17.78,0) 16(17.78,2.54)
TH12-254
  rect 1.5x1.5 hole 0.9: 1(0,0)
  round 1.5 hole 0.9: 2(2.54,0) 3(5.08,0) 4(7.62,0) 5(10.16,0) 6(12.7,0) 7(15.24,0) 8(17.78,0) 9(20.32,0) 10(22.86,0) 11(25.4,0) 12(27.94,0)
TH12T-254
  custom 1.2x4 smd: 1(0,0) 2(2.54,0) 3(5.08,0) 4(7.62,0) 5(10.16,0) 6(12.7,0) 7(15.24,0) 8(17.78,0) 9(20.32,0) 10(22.86,0) 11(25.4,0) 12(27.94,0)
TP80
  round 0.8 smd: 1(0,0)
TPS80
  rect 0.8x0.8 smd: 1(0,0)
TS-1187A
  custom 1.2x0.8 smd: 1(-3,1.875) 2(3,1.875) 3(-3,-1.875) 4(3,-1.875)
TSOP65P640X110-8
  oval 0.4x1.6 smd: 1(-0.975,-2.85) 2(-0.325,-2.85) 3(0.325,-2.85) 4(0.975,-2.85) 5(0.975,2.85) 6(0.325,2.85) 7(-0.325,2.85) 8(-0.975,2.85)
TSOP65P640X120-24
  oval 0.4x1.65 smd: 1(-3.575,-2.825) 2(-2.925,-2.825) 3(-2.275,-2.825) 4(-1.625,-2.825) 5(-0.975,-2.825) 6(-0.325,-2.825) 7(0.325,-2.825) 8(0.975,-2.825) 9(1.625,-2.825) 10(2.275,-2.825) 11(2.925,-2.825) 12(3.575,-2.825) 13(3.575,2.825) 14(2.925,2.825) 15(2.275,2.825) 16(1.625,2.825) 17(0.975,2.825) 18(0.325,2.825) 19(-0.325,2.825) 20(-0.975,2.825) 21(-1.625,2.825) 22(-2.275,2.825) 23(-2.925,2.825) 24(-3.575,2.825)
TSQFP50P900X900X160-48
  oval 1.65x0.27 smd: 1(-4.275,2.75) 2(-4.275,2.25) 3(-4.275,1.75) 4(-4.275,1.25) 5(-4.275,0.75) 6(-4.275,0.25) 7(-4.275,-0.25) 8(-4.275,-0.75) 9(-4.275,-1.25) 10(-4.275,-1.75) 11(-4.275,-2.25) 12(-4.275,-2.75) 25(4.275,-2.75) 26(4.275,-2.25) 27(4.275,-1.75) 28(4.275,-1.25) 29(4.275,-0.75) 30(4.275,-0.25) 31(4.275,0.25) 32(4.275,0.75) 33(4.275,1.25) 34(4.275,1.75) 35(4.275,2.25) 36(4.275,2.75)
  oval 0.27x1.65 smd: 13(-2.75,-4.275) 14(-2.25,-4.275) 15(-1.75,-4.275) 16(-1.25,-4.275) 17(-0.75,-4.275) 18(-0.25,-4.275) 19(0.25,-4.275) 20(0.75,-4.275) 21(1.25,-4.275) 22(1.75,-4.275) 23(2.25,-4.275) 24(2.75,-4.275) 37(2.75,4.275) 38(2.25,4.275) 39(1.75,4.275) 40(1.25,4.275) 41(0.75,4.275) 42(0.25,4.275) 43(-0.25,4.275) 44(-0.75,4.275) 45(-1.25,4.275) 46(-1.75,4.275) 47(-2.25,4.275) 48(-2.75,4.275)
TSQFP50P1290X1290X120-64
  oval 1.23x0.27 smd: 1(-5.935,3.75) 2(-5.935,3.25) 3(-5.935,2.75) 4(-5.935,2.25) 5(-5.935,1.75) 6(-5.935,1.25) 7(-5.935,0.75) 8(-5.935,0.25) 9(-5.935,-0.25) 10(-5.935,-0.75) 11(-5.935,-1.25) 12(-5.935,-1.75) 13(-5.935,-2.25) 14(-5.935,-2.75) 15(-5.935,-3.25) 16(-5.935,-3.75) 33(5.935,-3.75) 34(5.935,-3.25) 35(5.935,-2.75) 36(5.935,-2.25) 37(5.935,-1.75) 38(5.935,-1.25) 39(5.935,-0.75) 40(5.935,-0.25) 41(5.935,0.25) 42(5.935,0.75) 43(5.935,1.25) 44(5.935,1.75) 45(5.935,2.25) 46(5.935,2.75) 47(5.935,3.25) 48(5.935,3.75)
  oval 0.27x1.23 smd: 17(-3.75,-5.935) 18(-3.25,-5.935) 19(-2.75,-5.935) 20(-2.25,-5.935) 21(-1.75,-5.935) 22(-1.25,-5.935) 23(-0.75,-5.935) 24(-0.25,-5.935) 25(0.25,-5.935) 26(0.75,-5.935) 27(1.25,-5.935) 28(1.75,-5.935) 29(2.25,-5.935) 30(2.75,-5.935) 31(3.25,-5.935) 32(3.75,-5.935) 49(3.75,5.935) 50(3.25,5.935) 51(2.75,5.935) 52(2.25,5.935) 53(1.75,5.935) 54(1.25,5.935) 55(0.75,5.935) 56(0.25,5.935) 57(-0.25,5.935) 58(-0.75,5.935) 59(-1.25,5.935) 60(-1.75,5.935) 61(-2.25,5.935) 62(-2.75,5.935) 63(-3.25,5.935) 64(-3.75,5.935)
TYPE-C-16P
  round 0.65 hole 0.65: (-2.89,1.288) (2.89,1.288)
  oval 1x2.1 hole 0.6x1.7: 1(-4.32,1.787) 2(4.32,1.787) 3(-4.32,-2.362) 4(4.32,-2.362)
  custom 0.6x1.15 smd: A1B12(-3.2,2.362) A4B9(-2.4,2.362) B1A12(3.2,2.362) B4A9(2.4,2.362)
  custom 0.3x1.15 smd: A5(-1.25,2.362) A6(-0.25,2.362) A7(0.25,2.362) A8(-1.75,2.362) B5(1.75,2.362) B6(0.75,2.362) B7(-0.75,2.362) B8(1.25,2.362)
U-M-M5SS-W-2
  round 0.9 hole 0.9: (-2.55,2.2) (-2.55,-2.2)
  custom 2.5x0.5 smd: 1(0.5,-1.6) 2(0.5,-0.8) 3(0.5,0) 4(0.5,0.8) 5(0.5,1.6)
  custom 2.5x2 smd: 6(0,4.45) 7(0,-4.45) 8(-5.5,4.45) 9(-5.5,-4.45)
XH2-254
  rect 1.5x1.5 hole 0.9: 1(0,0)
  round 1.5 hole 0.9: 2(2.54,0)
XH3-254
  rect 1.5x1.5 hole 0.9: 1(0,0)
  round 1.5 hole 0.9: 2(2.54,0) 3(5.08,0)
XH4-254
  rect 1.5x1.5 hole 0.9: 1(0,0)
  round 1.5 hole 0.9: 2(2.54,0) 3(5.08,0) 4(7.62,0)
XH5-254
  rect 1.5x1.5 hole 0.9: 1(0,0)
  round 1.5 hole 0.9: 2(2.54,0) 3(5.08,0) 4(7.62,0) 5(10.16,0)
XH6-254
  rect 1.5x1.5 hole 0.9: 1(0,0)
  round 1.5 hole 0.9: 2(2.54,0) 3(5.08,0) 4(7.62,0) 5(10.16,0) 6(12.7,0)
XH7-254
  rect 1.5x1.5 hole 0.9: 1(0,0)
  round 1.5 hole 0.9: 2(2.54,0) 3(5.08,0) 4(7.62,0) 5(10.16,0) 6(12.7,0) 7(15.24,0)
XH8-254
  rect 1.5x1.5 hole 0.9: 1(0,0)
  round 1.5 hole 0.9: 2(2.54,0) 3(5.08,0) 4(7.62,0) 5(10.16,0) 6(12.7,0) 7(15.24,0) 8(17.78,0)
XH12-254
  rect 1.5x1.5 hole 0.9: 1(0,0)
  round 1.5 hole 0.9: 2(2.54,0) 3(5.08,0) 4(7.62,0) 5(10.16,0) 6(12.7,0) 7(15.24,0) 8(17.78,0) 9(20.32,0) 10(22.86,0) 11(25.4,0) 12(27.94,0)

## Nets
DGND: K1.3 K1.4 K2.2 K3.2 U1.16(VSS16) U1.32(VSS32) U2.2(GND) U2.7(EP) U3.4(GND) U3.5(EP) U5.2(GND1) U5.8(GND-1) U6.2(GND1) U6.8(GND-1) U8.2(GND1) U8.8(GND-1) U9.4(GND1) U10.4(GND1) U12.12(VSSA) U12.18(VSS1) U12.63(VSS2)
GND: C1.2 C2.2 C3.2 C4.2 C5.2 C7.1 C8.1 C9.1 C10.1 C11.1 C12.1 C13.1 C14.1 C15.1 C16.1 C17.2(-) C18.2 C19.1 D1.1 D2.2 D3.2 D4.2 D5.2 J1.1 J1.2 J1.3 J1.4 J1.A1B12(GND1) J1.B1A12(GND2) J2.1(GND) J2.6 J2.7 J2.8 J2.9 J16.1 J16.2 J16.3 J16.4 L1.2 L2.2 L3.2 L4.2 L5.2 L6.2 L7.2 L9.2 L10.2 LED1.1 LED2.1 LED3.1 LED4.1 R1.2 R2.2 R3.2 R4.2 R5.2 R6.1 R7.1 R9.1 R10.1 R13.1 R20.2 R21.1 T1.1 T2.1 T3.1 T4.1 T5.1 U4.7(GND) U4.9(EP) U5.9(GND-2) U5.15(GND2) U6.9(GND-2) U6.15(GND2) U8.9(GND-2) U8.15(GND2) U9.5(GND2) U10.5(GND2) U15.1(GND) U17.1(GND) U38.1(GND) Y2.2(GND)
PGND: C19.2 R21.2
VBUS: J1.A4B9(VBUS1) J1.B4A9(VBUS2) J2.5(VBUS)
VDD3V3: C1.1 C2.1 C3.1 C4.1 C5.1 C15.2 C16.2 C17.1(+) C18.1 D2.1 D3.1 D5.1 K1.1 K1.2 K2.1 K3.1 L1.1 L2.1 L3.1 L4.1 L5.1 L6.1 L7.1 L9.1 L10.1 LED1.2 LED2.2 LED3.2 Q1.3(C) Q2.2 R1.1 R2.1 R3.1 R4.1 R5.1 R18.2 R19.2 R20.1 U1.1(VDD1) U1.5(VDDA/VREF+) U1.17(VDD17) U2.5(VDD) U3.1(VCC) U5.1(VDD1) U6.1(VDD1) U8.1(VDD1) U9.1(VDD1) U10.1(VDD1) U12.13(VDDA) U12.19(VDD1) U12.32(VDD2) U12.48(VDD3) U12.64(VDD4) U15.2(VOUT1) U15.4(VOUT2) U17.2(VOUT) U38.2(VOUT) Y2.4(VCC)
VDD5V: C9.2 C10.2 C13.2 C14.2 L8.2 R12.2 R14.2 R15.2 R16.2 R17.2 U5.16(VDD2) U6.16(VDD2) U8.16(VDD2) U9.8(VDD2) U10.8(VDD2) U15.3(VIN) U17.3(VIN) U38.3(VIN)
VDD24V: C7.2 C8.2 D4.1 J16.5 J16.6 J16.7 J16.8 M1.3 M2.2 R8.2 U4.2(VIN) U16.1(S1) U16.2(S2) U16.3(S3)
BOOT0: U1.31(PH3/BOOT0)
NRST: U1.4(NRST)
OUT_N1: M1.2
OUT_NPN: Q1.2(E)
OUT_P1: M2.3
OUT_P2: U16.5(D5) U16.6(D6) U16.7(D7) U16.8(D8)
OUT_PNP: Q2.3(E)
TPS_EN: R8.1 R9.2 U4.3(EN)
TPS_FB: R12.1 R13.2 U4.5(FB)
USB_DN: J1.A7(DN1) J1.B7(DN2)
USB_DN1: J2.4(DN)
USB_DP: J1.A6(DP1) J1.B6(DP2)
USB_DP1: J2.3(DP)
N27394: J1.A5(CC1) R6.2
N27414: J1.B5(CC2) R7.2
N30293: C6.1 U4.1(BOOT)
N30301: C6.2 D1.2 L8.1 U4.8(SW)
N30425: R10.2 U4.4(RT/CLK)
N30513: C12.2 R11.2 U4.6(COMP)
N30655: C11.2 R11.1
N30815: LED4.2 R14.1
N32676: R15.1 U5.10(VE2)
N32999: R16.1 U6.10(VE2)
N33699: R17.1 U8.10(VE2)
N37245: R18.1 U6.7(VE1)
N37309: R19.1 U8.7(VE1)

Pads without a net: H1 1 2 3 4 5 6 7 8 9 10 11 12 13 14; J1 A8 B8; J2 2; J3 1 2; J4 1 2 3; J5 1 2 3 4; J6 1 2 3 4 5; J7 1 2 3 4 5 6; J8 1 2 3 4 5 6 7; J9 1 2 3 4 5 6 7 8; J10 1 2 3 4 5 6 7 8 9 10 11 12; J11 1 2; J12 1 2 3; J13 1 2 3 4; J14 1 2 3 4 5; J15 1 2 3 4 5 6; J17 1 2; J18 1 2 3; J19 1 2 3 4; J20 1 2 3 4 5; J21 1 2 3 4 5 6; J22 1 2 3 4 5 6 7; J23 1 2 3 4 5 6 7 8; J24 1 2 3 4 5 6 7 8 9 10 11 12; J25 1 2 3 4; J26 1 2 3 4 5 6; J27 1 2 3 4 5 6 7 8; J28 1 2 3 4 5 6 7 8 9 10; J29 1 2 3 4 5 6 7 8 9 10 11 12; J30 1 2 3 4 5 6 7 8 9 10 11 12 13 14; J31 1 2 3 4 5 6 7 8 9 10 11 12 13 14 15 16; J32 1 2; J33 1 2 3; J34 1 2 3 4; J35 1 2 3 4 5; J36 1 2 3 4 5 6; J37 1 2 3 4 5 6 7; J38 1 2 3 4 5 6 7 8; J39 1 2 3 4 5 6 7 8 9 10 11 12; M1 1; M2 1; Q1 1; Q2 1; U1 2 3 6 7 8 9 10 11 12 13 14 15 18 19 20 21 22 23 24 25 26 27 28 29 30; U2 1 3 4 6; U3 2 3; U5 3 4 5 6 7 11 12 13 14; U6 3 4 5 6 11 12 13 14; U8 3 4 5 6 11 12 13 14; U9 2 3 6 7; U10 2 3 6 7; U11 1 2 3 4 5 6 7 8; U12 1 2 3 4 5 6 7 8 9 10 11 14 15 16 17 20 21 22 23 24 25 26 27 28 29 30 31 33 34 35 36 37 38 39 40 41 42 43 44 45 46 47 49 50 51 52 53 54 55 56 57 58 59 60 61 62; U13 A1 A2 A3 A4 A5 A6 A7 A8 A9 A10 A11 A12 A13 A14 A15 A16 A17 B1 B2 B3 B4 B5 B6 B7 B8 B9 B10 B11 B12 B13 B14 B15 B16 B17 C1 C2 C3 C4 C5 C6 C7 C8 C9 C10 C11 C12 C13 C14 C15 C16 C17 D1 D2 D3 D4 D5 D6 D7 D8 D9 D10 D11 D12 D13 D14 D15 D16 D17 E1 E2 E3 E4 E5 E6 E7 E8 E9 E10 E11 E12 E13 E14 E15 E16 E17 F1 F2 F3 F4 F5 F13 F14 F15 F16 F17 G1 G2 G3 G4 G5 G7 G8 G9 G10 G11 G13 G14 G15 G16 G17 H1 H2 H3 H4 H5 H7 H8 H9 H10 H11 H13 H14 H15 H16 H17 J1 J2 J3 J4 J5 J7 J8 J9 J10 J11 J13 J14 J15 J16 J17 K1 K2 K3 K4 K5 K7 K8 K9 K10 K11 K13 K14 K15 K16 K17 L1 L2 L3 L4 L5 L7 L8 L9 L10 L11 L13 L14 L15 L16 L17 M1 M2 M3 M4 M5 M13 M14 M15 M16 M17 N1 N2 N3 N4 N5 N6 N7 N8 N9 N10 N11 N12 N13 N14 N15 N16 N17 P1 P2 P3 P4 P5 P6 P7 P8 P9 P10 P11 P12 P13 P14 P15 P16 P17 R1 R2 R3 R4 R5 R6 R7 R8 R9 R10 R11 R12 R13 R14 R15 R16 R17 T1 T2 T3 T4 T5 T6 T7 T8 T9 T10 T11 T12 T13 T14 T15 T16 T17 U1 U2 U3 U4 U5 U6 U7 U8 U9 U10 U11 U12 U13 U14 U15 U16 U17; U14 A1 A2 A3 A7 A8 A9 B1 B2 B3 B7 B8 B9 C1 C2 C3 C7 C8 C9 D1 D2 D3 D7 D8 D9 E1 E2 E3 E7 E8 E9 F1 F2 F3 F7 F8 F9 G1 G2 G3 G7 G8 G9 H1 H2 H3 H7 H8 H9 J1 J2 J3 J7 J8 J9 K1 K2 K3 K7 K8 K9 L1 L2 L3 L7 L8 L9 M1 M2 M3 M7 M8 M9 N1 N2 N3 N7 N8 N9 P1 P2 P3 P7 P8 P9 R1 R2 R3 R7 R8 R9; U16 4; U18 1 2 3 4 5 6 7 8 9 10 11 12 13 14 15 16 17 18 19 20 21 22 23 24 25 26 27 28 29 30 31 32 33 34 35 36 37 38 39 40 41 42 43 44 45 46 47 48; U19 1 2 3 4 5 6 7 8; U20 1 2 3 4 5 6 7 8; U21 1 2 3 4 5 6 7 8 9 10 11 12 13 14 15 16; U22 1 2 3 4 5 6 7 8 9 10 11 12 13 14 15 16 17 18 19 20 21 22 23 24 25 26 27 28 29 30 31 32 33 34 35 36 37 38 39 40 41 42 43 44 45 46 47 48; U23 1 2 3 4; U24 1 2 3 4 5 6 7 8 9 10 11 12 13 14 15 16; U25 1 2 3 4 5 6 7 8 9 10 11 12 13 14; U26 1 2 3 4 5 6 7 8 9 10 11 12 13 14 15 16 17 18 19 20; U27 1 2 3 4 5 6 7 8 9 10 11 12 13 14 15 16 17 18 19 20 21 22 23 24 25 26 27 28 29 30 31 32 33 34 35 36 37 38 39 40 41 42 43 44; U28 1 2 3 4 5 6 7 8 9 10 11 12 13 14 15 16 17 18 19 20 21 22 23 24 25 26 27 28 29 30 31 32 33 34 35 36; U29 1 2 3 4 5 6 7 8 9 10 11 12 13 14 15 16 17 18 19 20 21 22 23 24; U30 1 2 3 4 5 6; U32 1 2 3 4 5 6 7 8; U33 1 2 3 4 5 6 7 8 9; U34 1 2 3 4 5 6 7 8 9; U35 1 2 3 4 5 6 7 8; U36 1 2 3 4 5 6 7 8 9 10 11 12 13 14 15 16 17 18 19 20 21 22 23 24 25 26 27 28 29 30 31 32; U37 1 2 3 4 5 6 7 8 9; U39 1 2 3 4 5 6 7 8 9 10 11 12 13 14 15 16 17 18 19 20 21 22 23 24 25 26 27 28; Y1 1 2; Y2 1 3; Y3 1 2 3 4

## Text on the board
Ref Des/Silkscreen Top: NMOS | PMOS | NPN | PNP | TMC5130 | W5500 | DRV8412 | DRV8432 | base | chip | mcu | HDR
